# Altium PCB UV_Watch_Pogo-1.PcbDoc
Units mil, origin at the board's own origin, x right, y up, seen from the top; angles counter-clockwise.
Board outline 1815 x 1710 mil, 2 copper layers (Top Layer, Bottom Layer), stack 12.8 mil thick; 31 components, 15 nets, 35 pads, 0 vias.
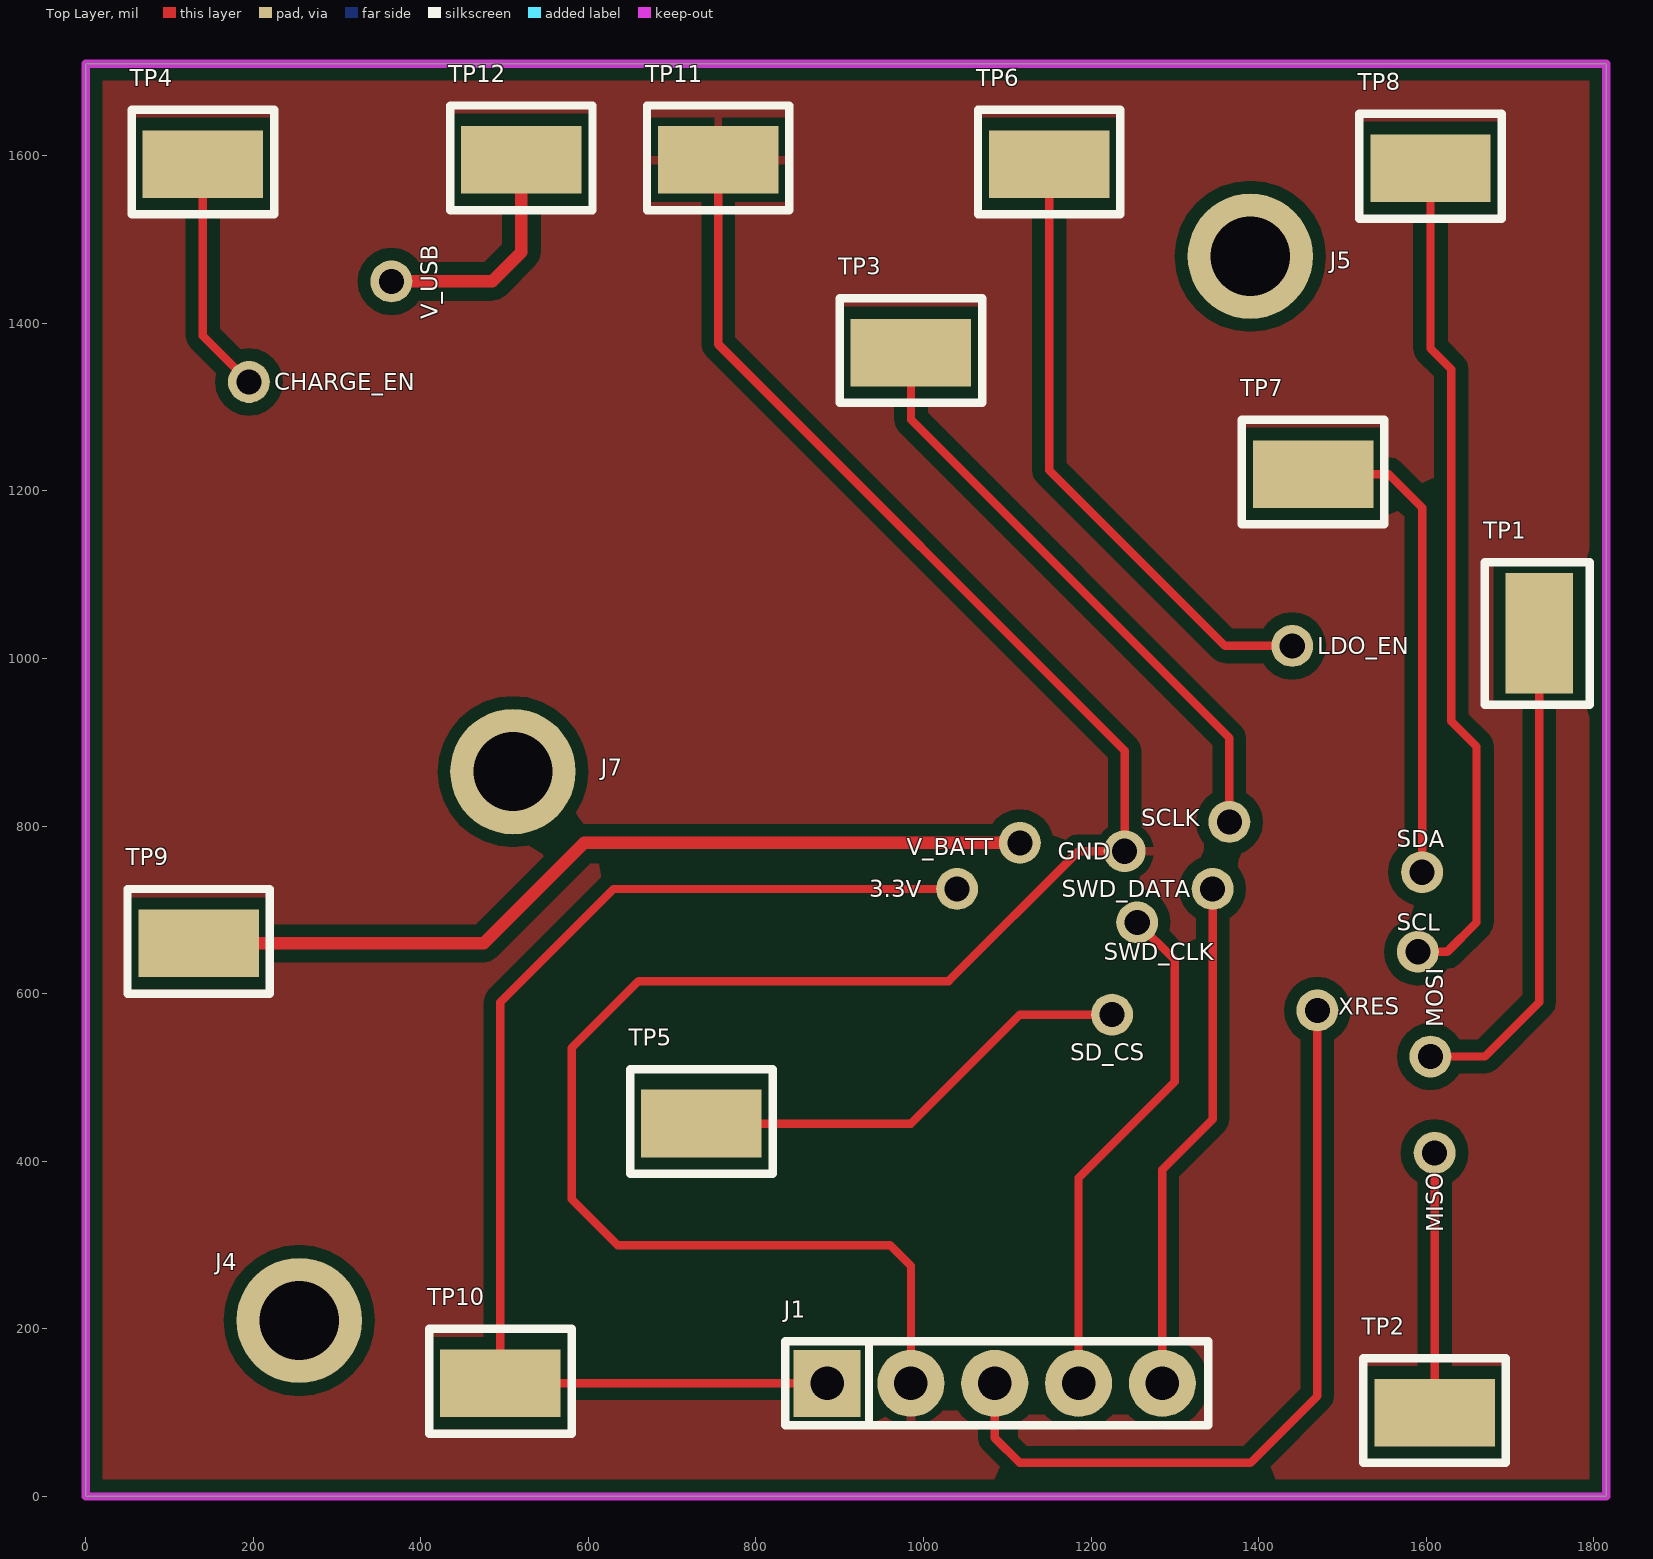
[diagram p0: Top Layer view]
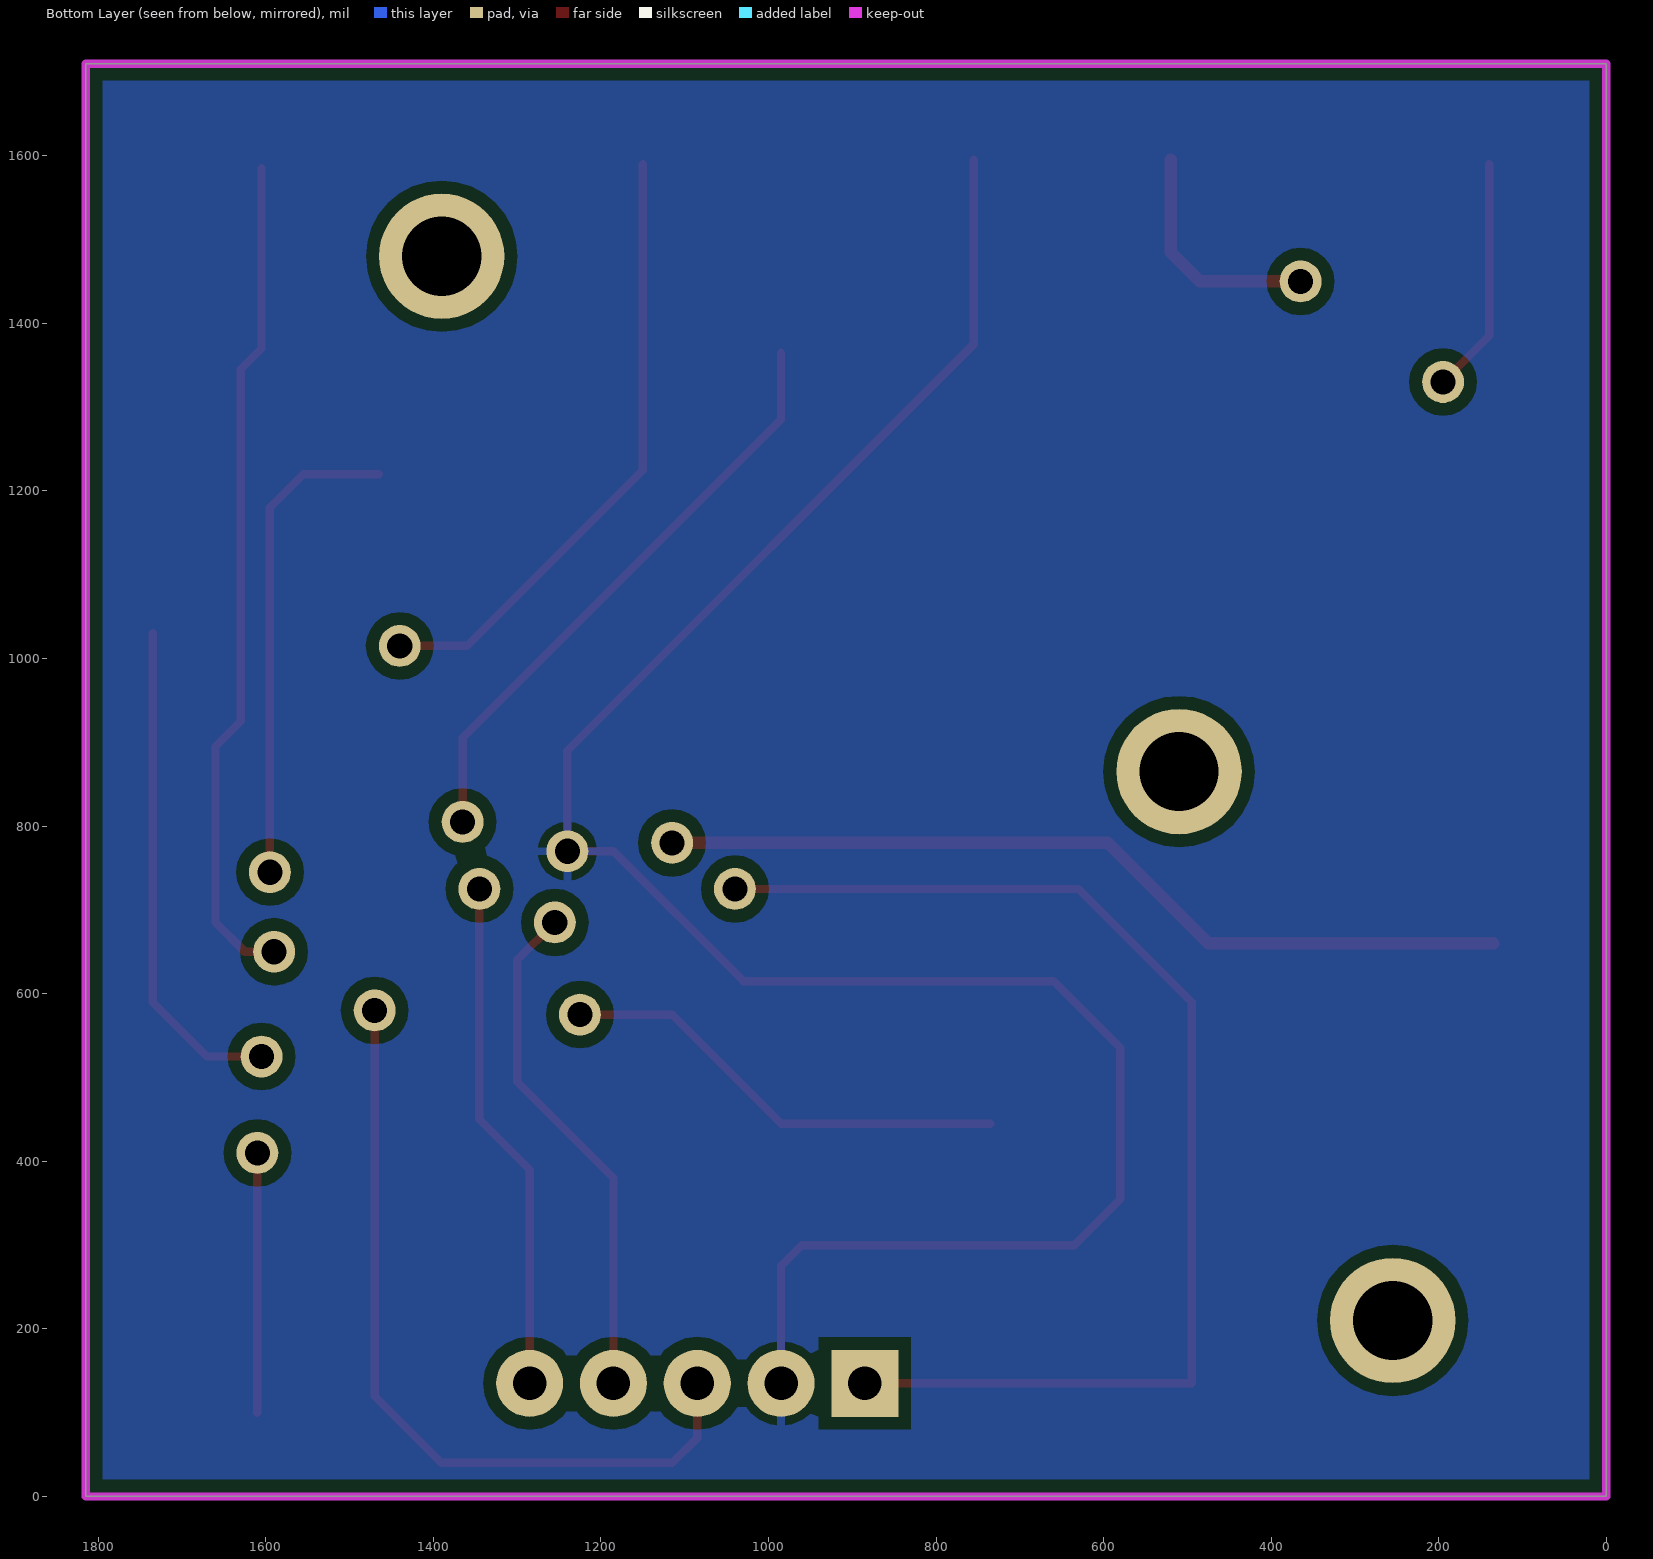
[diagram p1: Bottom Layer view, seen from below]

## Layer stack, top to bottom
Top Solder: solder mask 0.4, Solder Resist, Dk 3.5
Top Layer: signal copper 1.4
Dielectric 1: core 10, FR-4, Dk 4.2
Bottom Layer: signal copper 1.4
Bottom Solder: solder mask 0.4, Solder Resist, Dk 3.5

## Board outline
0,0 1815,0 1815,1710 0,1710

## Design rules (kind name [scope] priority, off if disabled: settings)
Clearance [All] p1: gap=15 ignorepadtopadclearanceinfootprint=FALSE
MinimumSolderMaskSliver [All] p1: minsoldermaskwidth=6
PolygonConnect [All] p1: connectstyle=Relief reliefconductorwidth=10 reliefentries=4 polygonreliefangle="90 Angle" airgapwidth=10
RoutingVias [All] p1: holewidth=14 width=25 viastyle="Through Hole" minholewidth=12 minwidth=15 maxholewidth=28 maxwidth=50
SilkToSilkClearance [All] p1: silktosilkclearance=6
SilkToSolderMaskClearance [IsPad] p1: minsilkscreentomaskgap=6 clearancetoexposedcopper=TRUE
SolderMaskExpansion [All] p1: expansion=4
UnRoutedNet [All] p1: checkbadconnections=TRUE
Width [All] p1: maxlimit=50 minlimit=10 preferedwidth=10 minimp=50.000000 maximp=50.000000 favimp=50.000000
26 further rules are at their usual default settings.

## Components (designator, comment, footprint, x,y, rotation, side; value= is the part's Value field where it differs from the comment)
3.3V "Pogo-Pin Pad" Pogo-Pin-Hole 1040,725 r90 top
CHARGE_EN "Pogo-Pin Pad" Pogo-Pin-Hole 195,1330 r180 top
GND "Pogo-Pin Pad" Pogo-Pin-Hole 1240,770 r180 top
J1 "MiniProg3" "HEADER 5X1 8.5MM" 885,135 r0 top
J4 "M2/2-56 Mounting Hole" "MOUNTING HOLE" 255,210 r0 top
J5 "M2/2-56 Mounting Hole" "MOUNTING HOLE" 1390,1480 r0 top
J7 "M2/2-56 Mounting Hole" "Mounting Hole" 510,865 r0 top
LDO_EN "Pogo-Pin Pad" Pogo-Pin-Hole 1440,1015 r180 top
MISO "Pogo-Pin Pad" Pogo-Pin-Hole 1610,410 r90 top
MOSI "Pogo-Pin Pad" Pogo-Pin-Hole 1605,525 r90 top
SCL "Pogo-Pin Pad" Pogo-Pin-Hole 1590,650 r90 top
SCLK "Pogo-Pin Pad" Pogo-Pin-Hole 1365,805 r90 top
SD_CS "Pogo-Pin Pad" Pogo-Pin-Hole 1225,575 r90 top
SDA "Pogo-Pin Pad" Pogo-Pin-Hole 1595,745 r90 top
SWD_CLK "Pogo-Pin Pad" Pogo-Pin-Hole 1255,685 r180 top
SWD_DATA "Pogo-Pin Pad" Pogo-Pin-Hole 1345,725 r90 top
TP1 "S1751-46R" S1751-46R 1735,1030 r90 top
TP2 "S1751-46R" S1751-46R 1610,100 r0 top
TP3 "S1751-46R" S1751-46R 985,1365 r0 top
TP4 "S1751-46R" S1751-46R 140,1590 r0 top
TP5 "S1751-46R" S1751-46R 735,445 r0 top
TP6 "S1751-46R" S1751-46R 1150,1590 r0 top
TP7 "S1751-46R" S1751-46R 1465,1220 r0 top
TP8 "S1751-46R" S1751-46R 1605,1585 r0 top
TP9 "S1751-46R" S1751-46R 135,660 r0 top
TP10 "S1751-46R" S1751-46R 495,135 r0 top
TP11 "S1751-46R" S1751-46R 755,1595 r0 top
TP12 "S1751-46R" S1751-46R 520,1595 r0 top
V_BATT "Pogo-Pin Pad" Pogo-Pin-Hole 1115,780 r180 top
V_USB "Pogo-Pin Pad" Pogo-Pin-Hole 365,1450 r90 top
XRES "Pogo-Pin Pad" Pogo-Pin-Hole 1470,580 r90 top

## Footprints (in the part's own frame and the unit in brackets; to place one, negate y for a bottom-side part, rotate by r counter-clockwise, add the part's x,y. Pads: shape width x height; smd on the part's side, far side on the other; paste and mask are expansions set on the pad)
"HEADER 5X1 8.5MM" [mil] "Stackable 5 pin header"
  rect 80x80 hole 40: 1(0,0)
  round 80 hole 40: 2(100,0) 3(200,0) 4(300,0) 5(400,0)
  silkscreen extent -50,-50 455,50, body extent -50,-50 350,50, height 358
"MOUNTING HOLE" [mm] "M2 or 2-56 Mounting Hole"
  round 3.8 hole 2.4: 11(0,0)
"Mounting Hole" [mm] "M2 or 2-56 Mounting Hole"
  round 3.8 hole 2.4: 11(0,0)
Pogo-Pin-Hole [mil]
  round 50 hole 30: 1(0,0)
S1751-46R [mm] "PC TEST POINT TIN SMD"
  rect 3.65x2.05 smd: 1(0,0)
  silkscreen extent -2.16,-1.52 2.16,1.65, body extent -1.62,-0.89 1.62,0.76, height 2.05

## Part data
3.3V CHARGE_EN GND LDO_EN MISO MOSI SCL SCLK SD_CS SDA SWD_CLK SWD_DATA V_BATT V_USB XRES: Contact Resistance=30mR, Current Rating=3A, Manufacturer=Harwin, Manufacturer Part Number=P13-2123, Max Operating Temperature=85°C, Min Operating Temperature=-40°C, Package Quantity=500, Resistance=0.03R, Supplier Part Number 1=855-P13-2123, Body Material=Bronze, Body Plating=Gold, ComponentLink1Description=https://datasheet.ciiva.com/1454/1498711-1454531.pdf, ComponentLink1URL=https://datasheet.ciiva.com/1454/1498711-1454531.pdf, ComponentLink2Description=https://datasheet.ciiva.com/5229/p13-xx23-351008-5229722.pdf, ComponentLink2URL=https://datasheet.ciiva.com/5229/p13-xx23-351008-5229722.pdf, Contact Material=Copper, Depth=1mm, Description 1="HARWIN         P13-2123             PROBE, CONVEX, 1.27MM PITCH", Gender=Male, Length=0.652inch, Material=Bronze, Mating Cycles=1000000, Pricing 1="1=3.36, 10=3.22, 50=2.82, 100=2.69, 1000=1.95, 10000=1.82 (USD)", Radiation Hardening=No, REACH SVHC="No SVHC", Stock 1=1373, Supplier 1=Mouser
TP1 TP2 TP3 TP4 TP5 TP6 TP7 TP8 TP9 TP10 TP11 TP12: "PC TEST POINT TIN SMD", Color=Natural, Manufacturer="Harwin Inc.", Supplier Part Number 1=952-1478-1-ND, Category="Test and Measurement", ComponentLink1Description=http://cdn.harwin.com/pdfs/S1751.pdf, ComponentLink1URL=http://cdn.harwin.com/pdfs/S1751.pdf, Manufacturer Part Number=S1751-46R, Material="Copper Alloy", Mounting Type="Surface Mount", Packaging="Cut Tape (CT)", Pricing 1="1=0.29, 10=0.272, 25=0.2324, 50=0.2032, 100=0.1888, 250=0.167, 500=0.15972, 1000=0.13068 (USD)", RoHS="RoHS Compliant", Stock 1=275112, Supplier 1=Digi-Key, Terminal="0.128\" x 0.065\" x 0.079\" (3.25mm x 1.65mm x 2.00mm) Brass, Tin Plated", Type="PC Test Point"

## Nets (pads, with @x,y where several pads share a name; then routed paths per layer and width w, separated by ;. In a path a pad name is that pad's centre, name@x,y a point inside that pad or via, vN(x,y) a via of type N, cw(c..) or ccw(c..) an arc to the next point about the centre after c; other vN are vias at no path point)
3.3V: 3.3V.1 J1.1 TP10.1 | length 1445.9
  Top Layer w10: J1.1 TP10.1 495,590 630,725 3.3V.1
CHARGE_EN: CHARGE_EN.1 TP4.1 | length 282.8
  Top Layer w10: TP4.1 140,1385 CHARGE_EN.1
GND: GND.1 J1.2 TP11.1 | length 2541.4
  Top Layer w10: TP11.1 755,1375 1240,890 GND.1 1185,770 1030,615 660,615 580,535 580,355 635,300 960,300 985,275 J1.2
LDO_EN: LDO_EN.1 TP6.1 | length 742
  Top Layer w10: TP6.1 1150,1225 1360,1015 LDO_EN.1
MISO: MISO.1 TP2.1 | length 310
  Top Layer w10: TP2.1 MISO.1
MOSI: MOSI.1 TP1.1 | length 596.9
  Top Layer w10: MOSI.1 1670,525 1735,590 TP1.1
SCL: SCL.1 TP8.1 | length 1007.3
  Top Layer w10: SCL.1 1625,650 1660,685 1660,895 1630,925 1630,1345 1605,1370 TP8.1
SCLK: SCLK.1 TP3.1 | length 717.4
  Top Layer w10: TP3.1 985,1285 1365,905 SCLK.1
SD_CS: SD_CS.1 TP5.1 | length 543.8
  Top Layer w10: TP5.1 985,445 1115,575 SD_CS.1
SDA: SDA.1 TP7.1 | length 581.6
  Top Layer w10: TP7.1 1555,1220 1595,1180 SDA.1
SWD_CLK: J1.4 SWD_CLK.1 | length 616.3
  Top Layer w10: J1.4 1185,380 1300,495 1300,640 SWD_CLK.1
SWD_DATA: J1.5 SWD_DATA.1 | length 614.9
  Top Layer w10: J1.5 1285,390 1345,450 SWD_DATA.1
V_BATT: TP9.1 V_BATT.1 | length 1029.7
  Top Layer w15: TP9.1 475,660 595,780 V_BATT.1
V_USB: TP12.1 V_USB.1 | length 279.5
  Top Layer w15: V_USB.1 485,1450 520,1485 TP12.1
XRES: J1.3 XRES.1 | length 955.6
  Top Layer w10: J1.3 1085,70 1115,40 1390,40 1470,120 XRES.1
pads on no net: J4.11 J5.11 J7.11

## Polygon pours and split planes (outlines as drawn)
GND on Top Layer "GND_TOP" (solid, remove dead copper, pour order 6): 0,0 0,1710 1815,1710 1815,0
GND on Bottom Layer "GND_BOTTOM" (solid, remove dead copper, pour order 8): 0,0 0,1710 1815,1710 1815,0

## Keep-outs
Keep-Out Layer:
  the board outline again, w10

## Silkscreen, mask and mechanical layers (free items; w line width, h text height)
Mechanical 3:
  the board outline again, w10